# Altium PCB DAC_PCB_Jan311.PcbDoc
Units mil, origin at the board's own origin, x right, y up, seen from the top; angles counter-clockwise.
Board outline 1555 x 2075 mil, 4 copper layers (Top Layer, VDD, GND, Bottom Layer), stack 23.756 mil thick; 30 components, 30 nets, 112 pads, 25 vias.
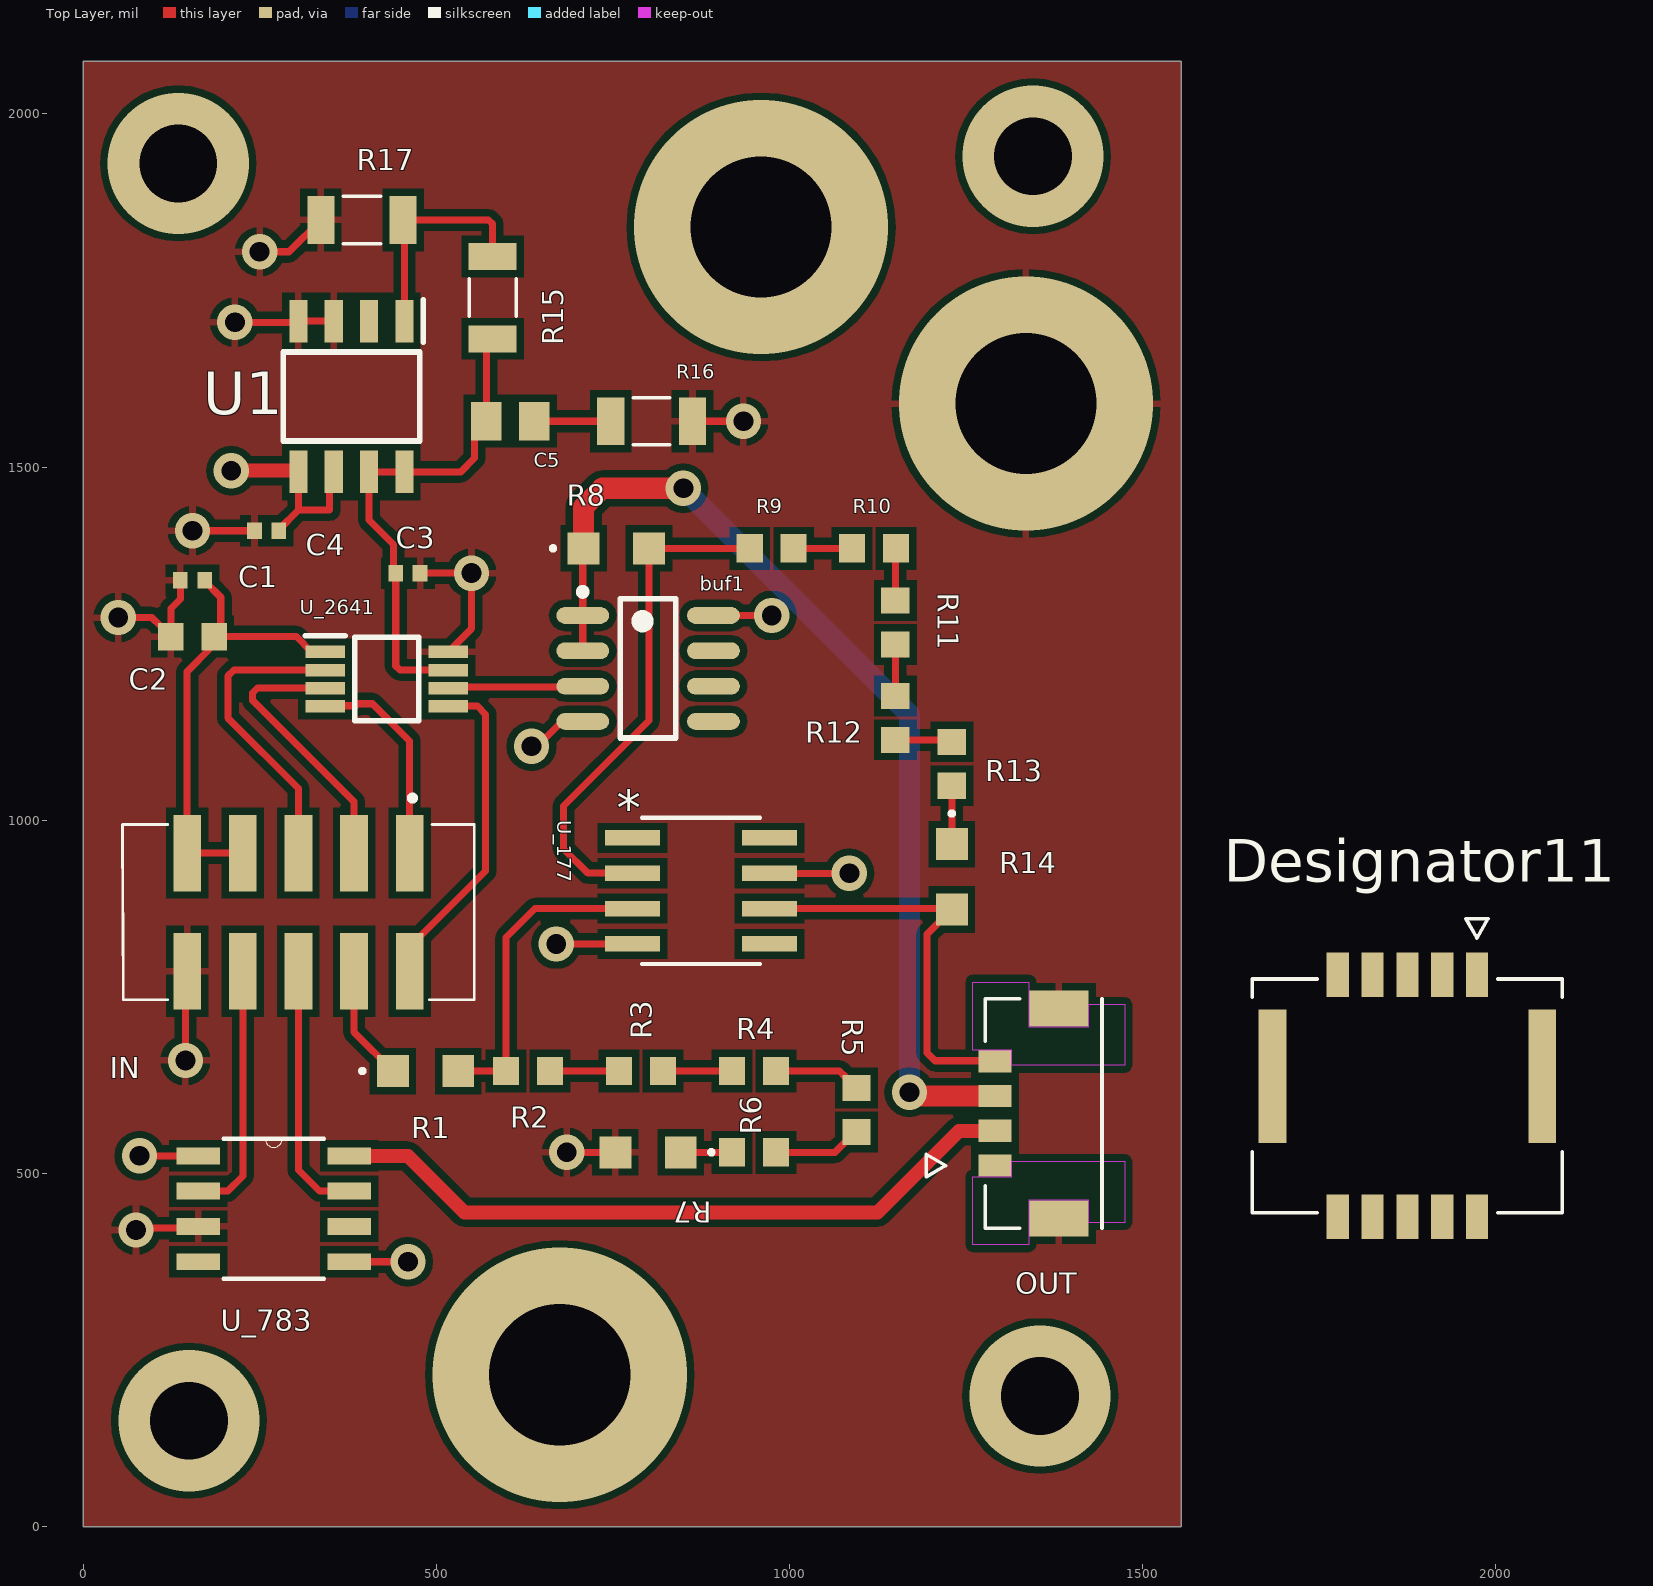
[diagram p0: Top Layer view]
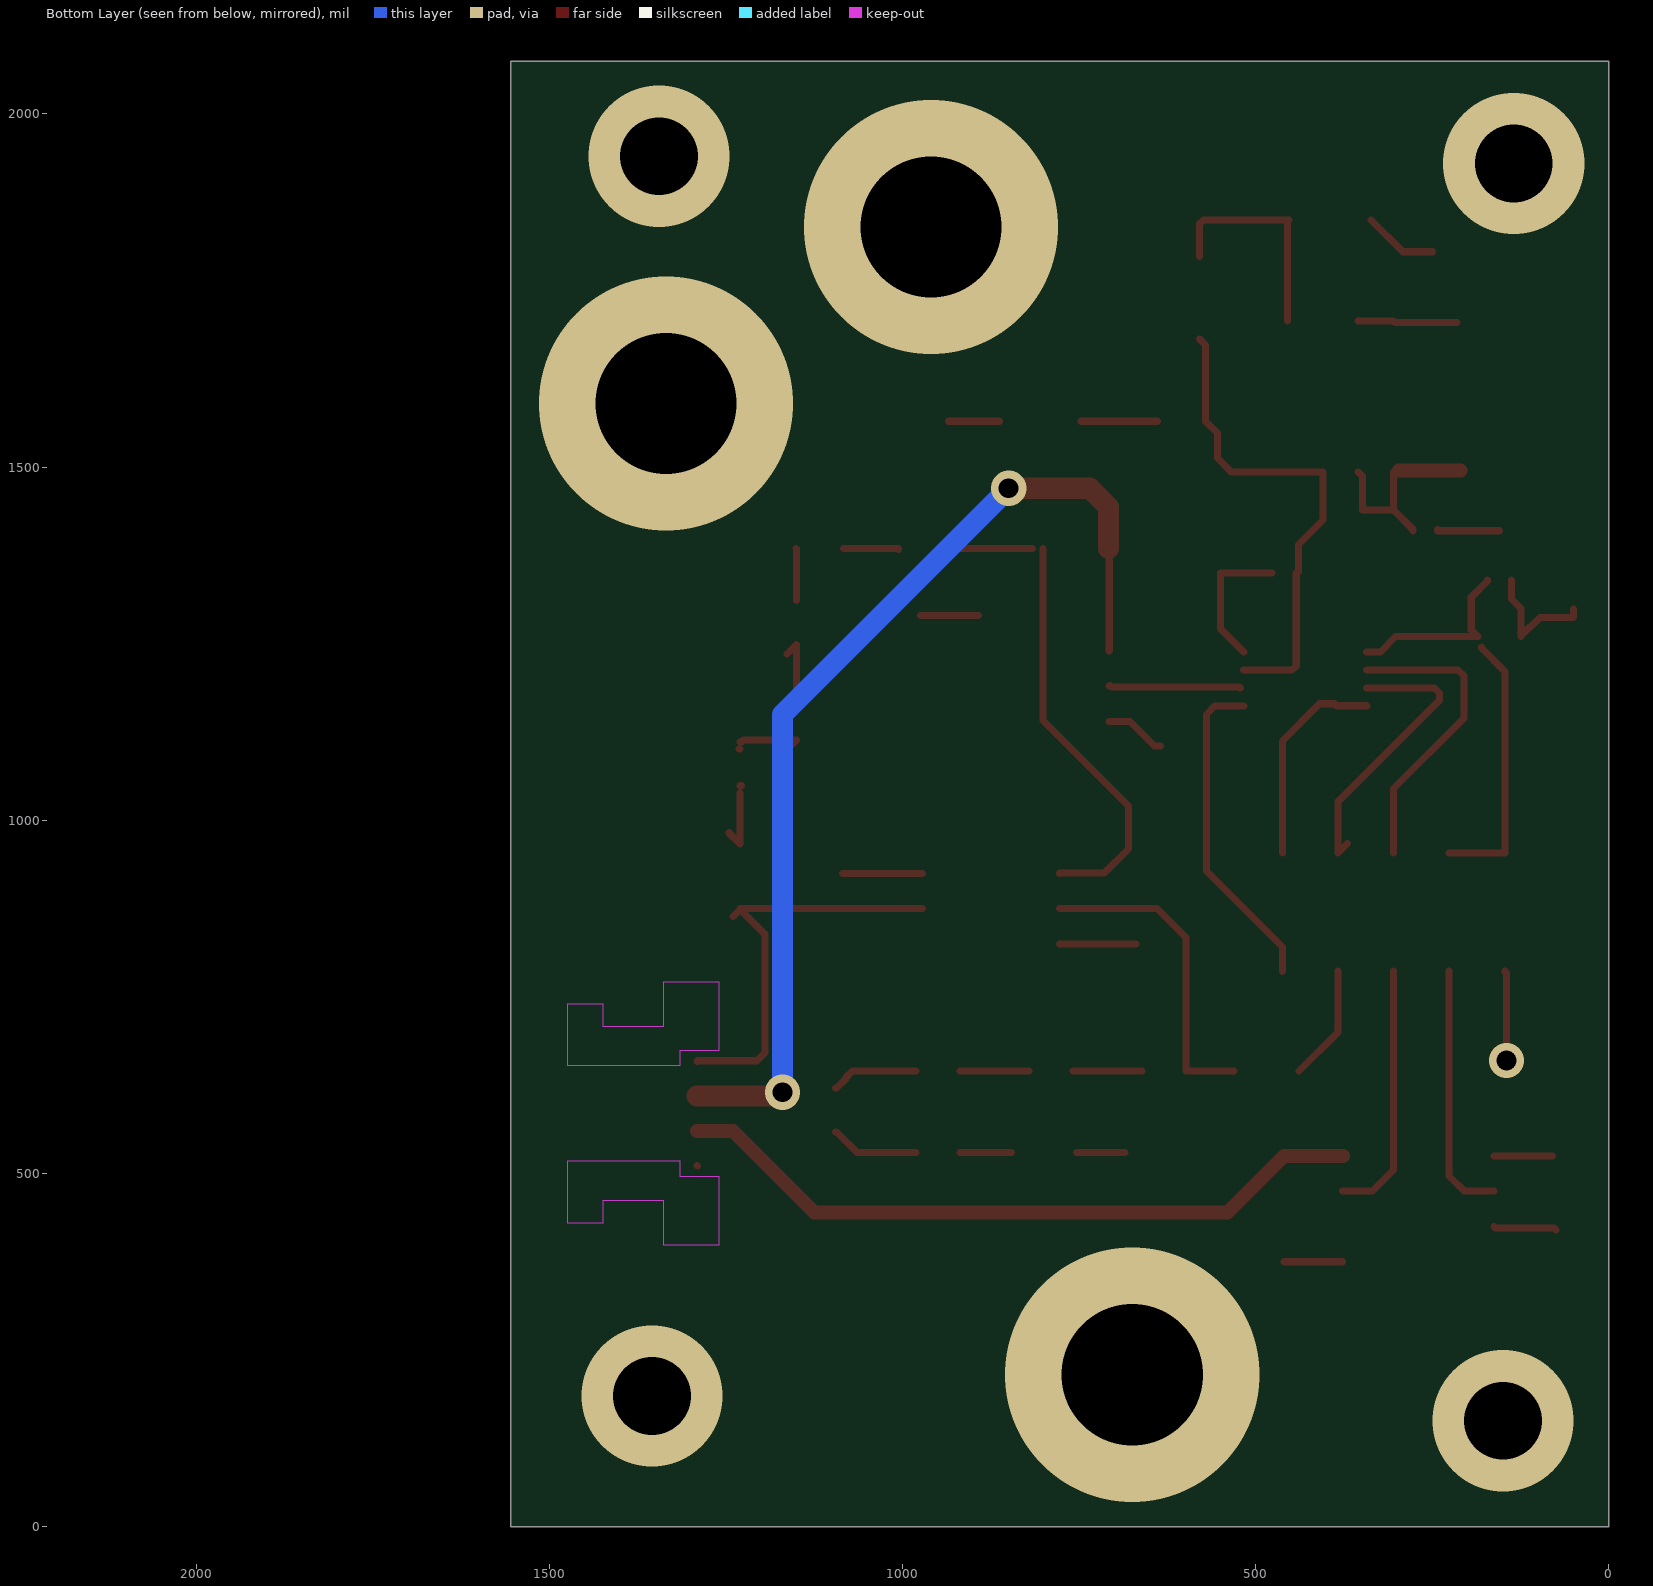
[diagram p1: Bottom Layer view, seen from below]
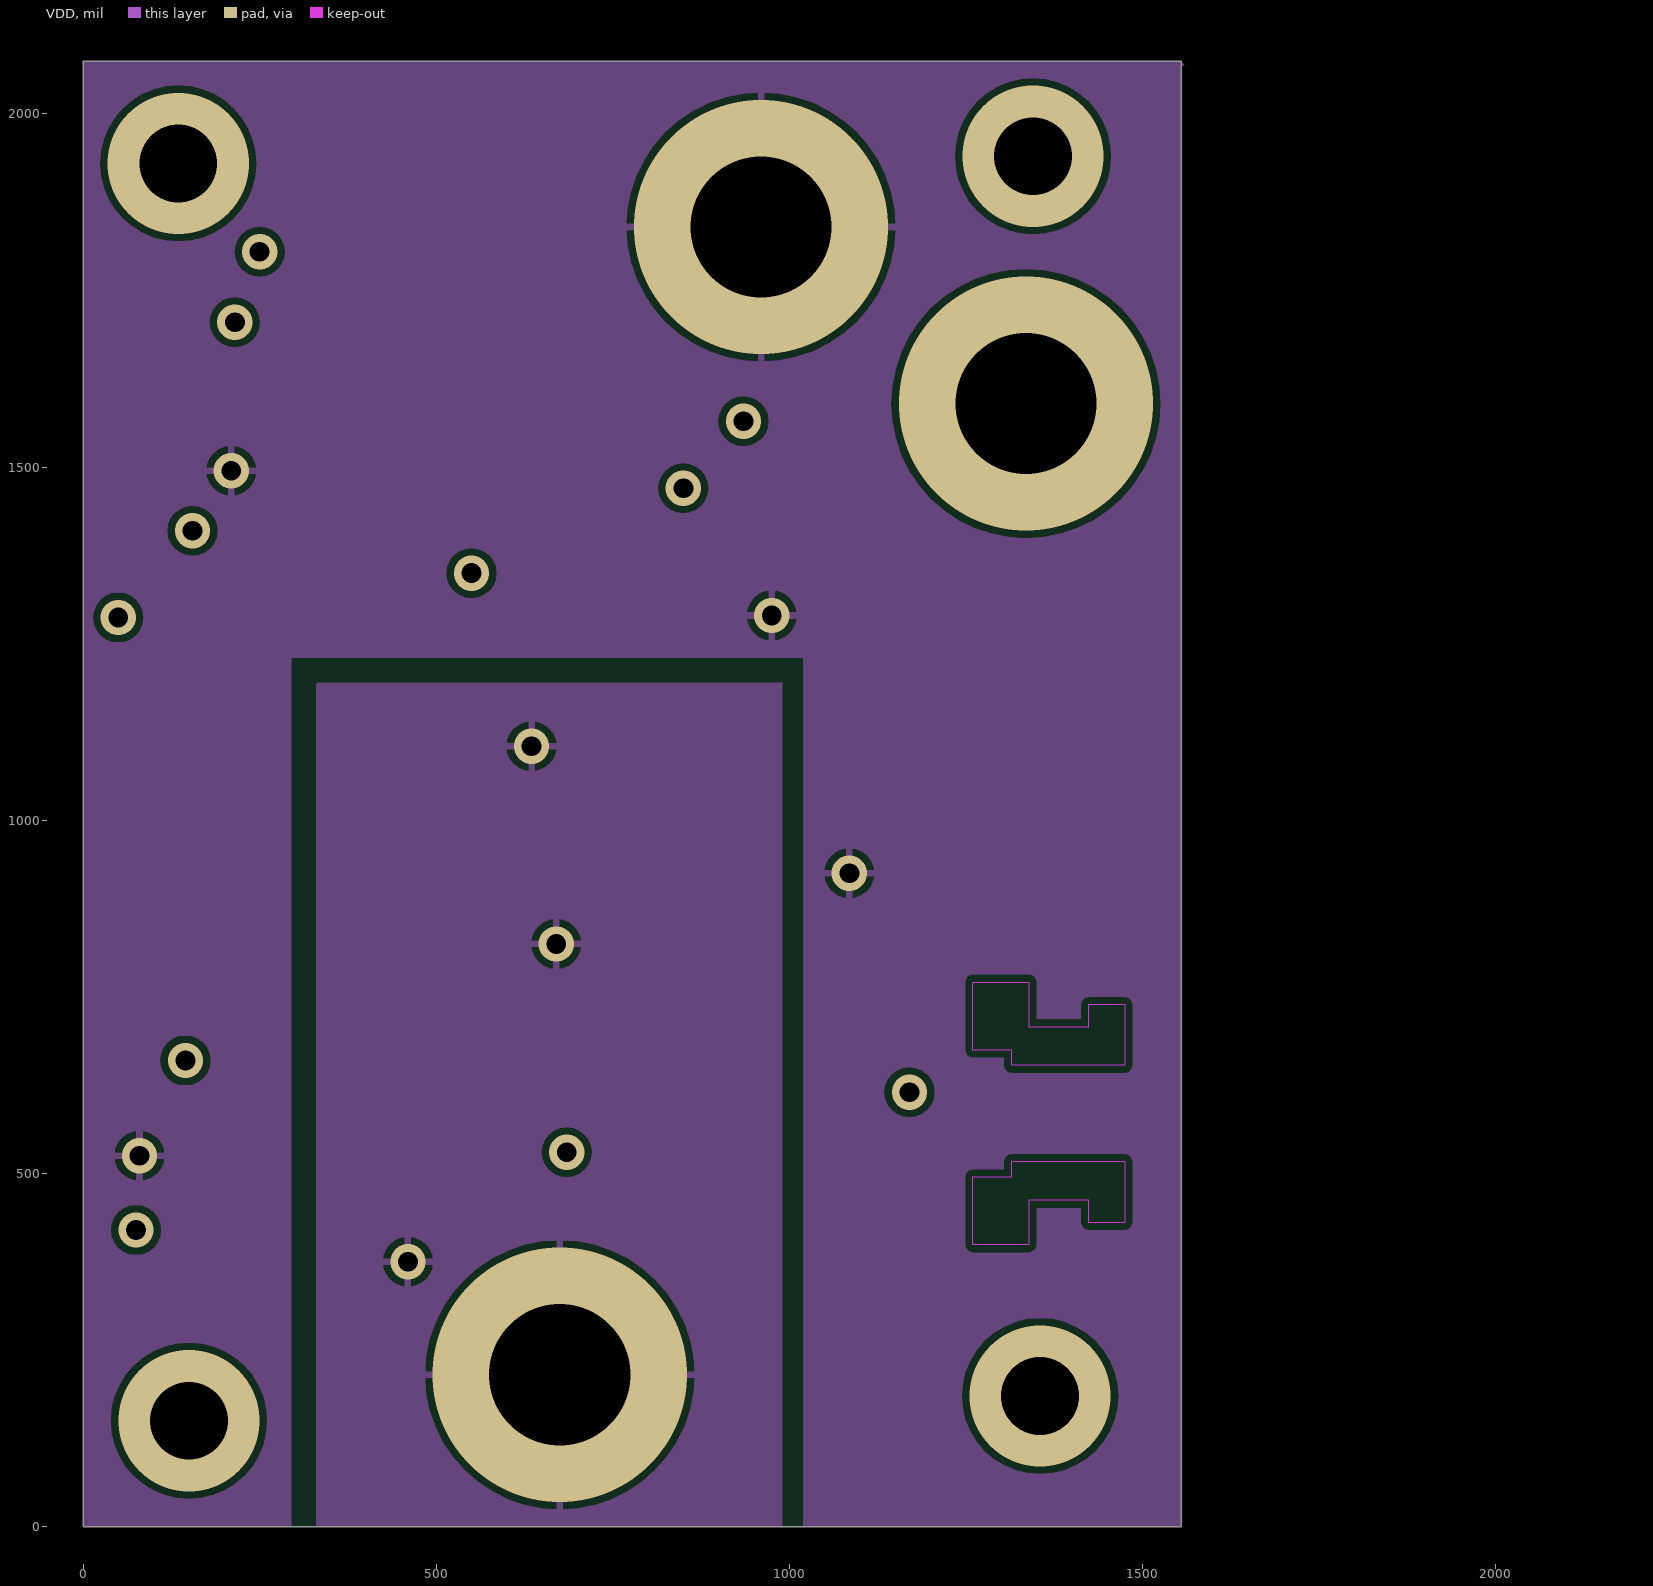
[diagram p2: VDD]
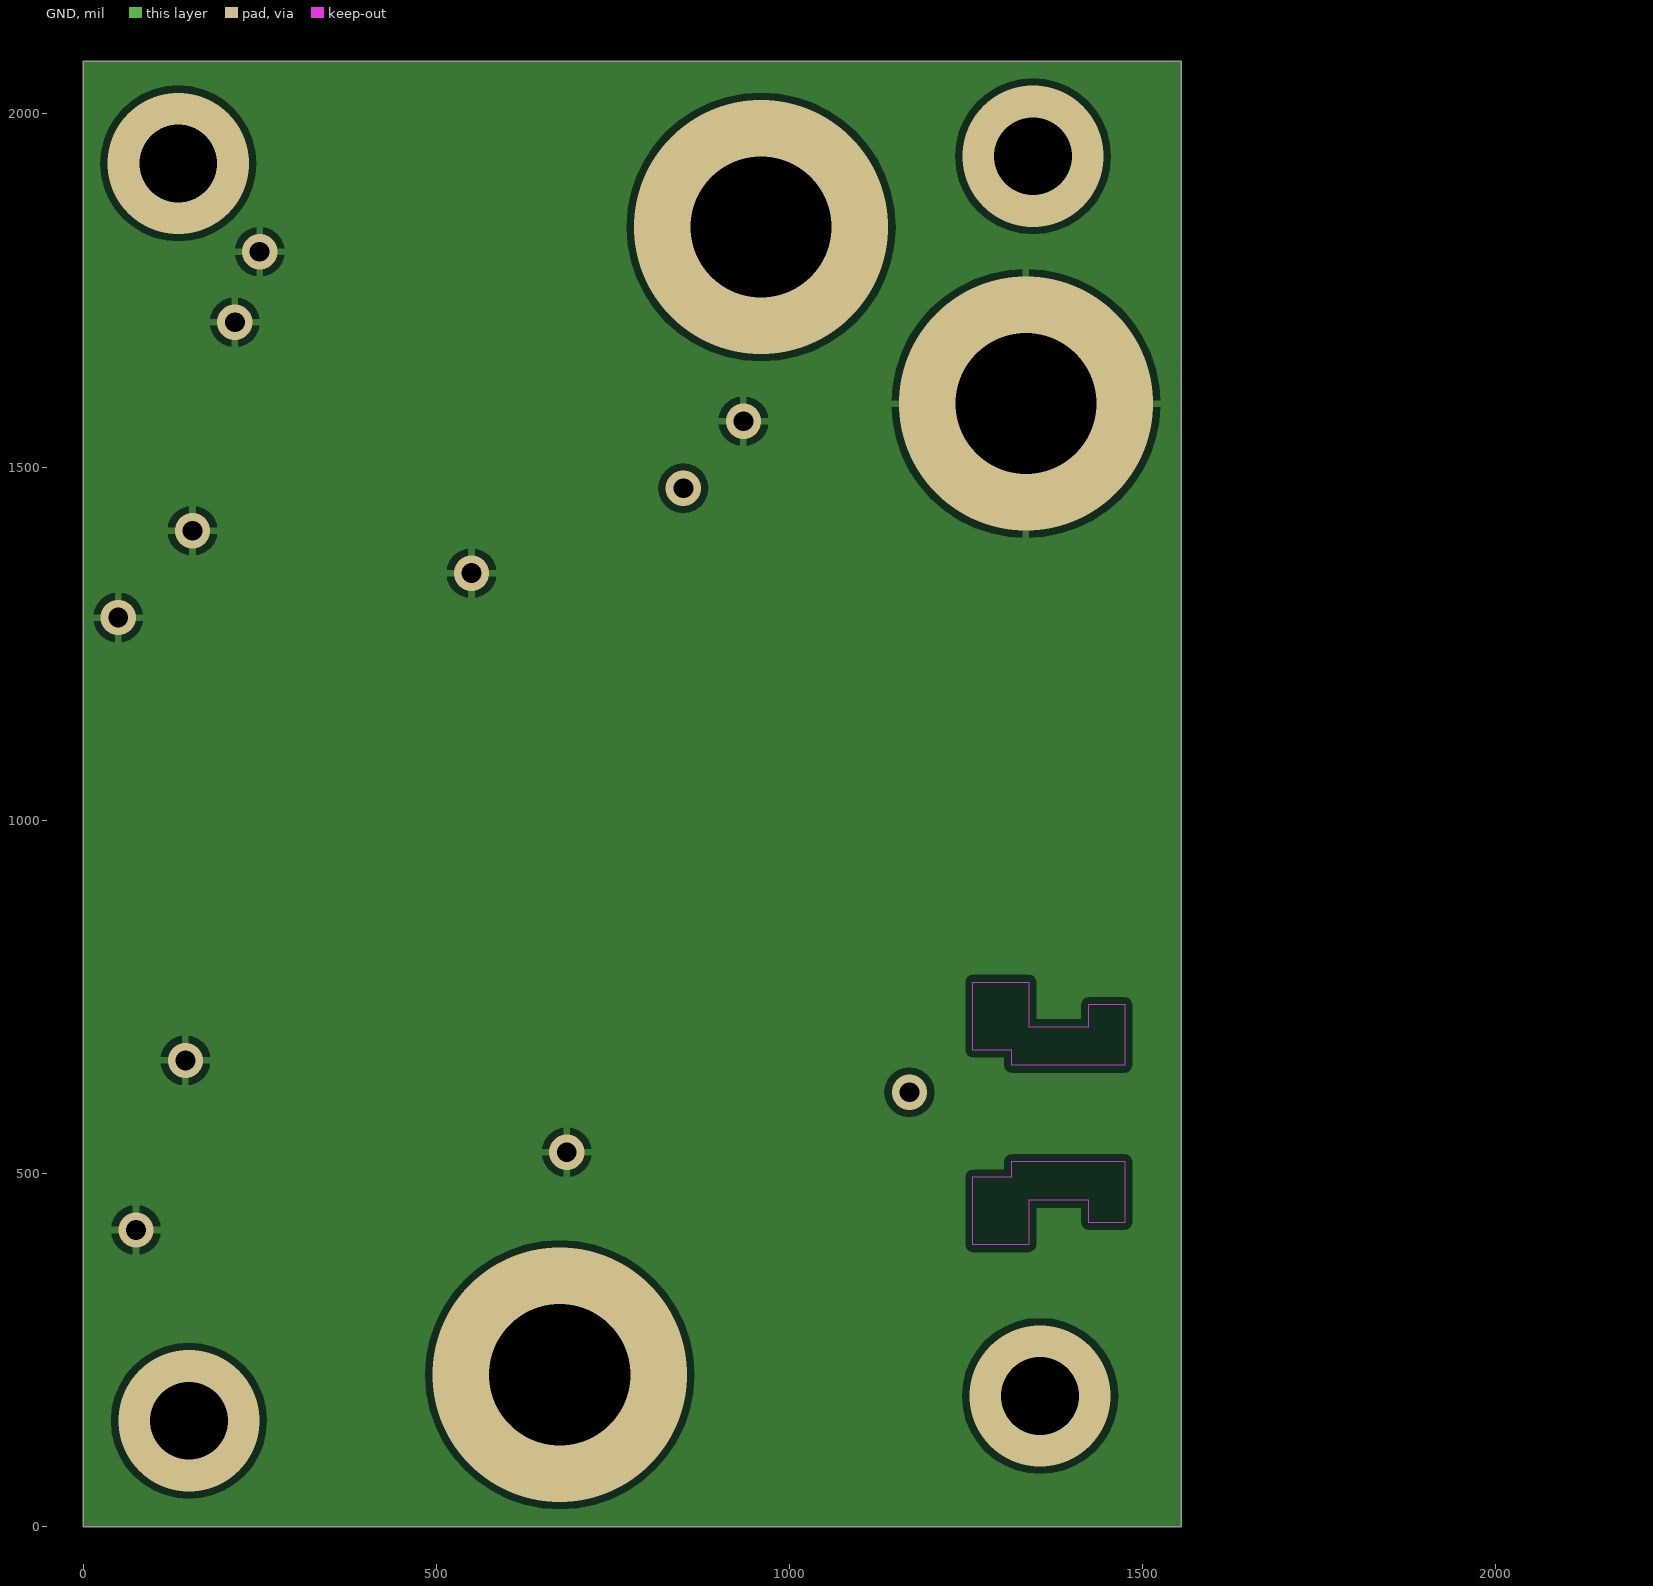
[diagram p3: GND]

## Layer stack, top to bottom
Top Solder: solder mask 0.4, Solder Resist, Dk 3.5
Top Layer: signal copper 1.4
Dielectric 1: prepreg 2.8, PP-006, Dk 4.1
VDD: signal copper 1.378
Dielectric 2: prepreg 12.6, FR-4, Dk 4.8
GND: signal copper 1.378
Dielectric 3: prepreg 2.8, PP-006, Dk 4.1
Bottom Layer: signal copper 1.4
Bottom Solder: solder mask 0.4, Solder Resist, Dk 3.5

## Board outline
0,0 1555,0 1555,2075 0,2075

## Design rules (kind name [scope] priority, off if disabled: settings)
Clearance [All] p1: gap=10 ignorepadtopadclearanceinfootprint=TRUE except(0: Arc-Hole Track-Hole SMDPad-Hole THPad-Hole Via-Hole Fill-Hole Poly-Hole Region-Hole Text-Hole)
PolygonConnect [All] p1: connectstyle=Relief reliefconductorwidth=10 reliefentries=4 polygonreliefangle="90 Angle" airgapwidth=10
RoutingVias [All] p1: holewidth=28 width=50 viastyle="Through Hole" minholewidth=28 minwidth=50 maxholewidth=28 maxwidth=50
SolderMaskExpansion [All] p1: expansion=4 istentingtop=FALSE
Width [All] p1: maxlimit=30 minlimit=10 preferedwidth=10 midlayer1_maxwidth=10 midlayer2_maxwidth=10 minimp=50.000000 maximp=50.000000 favimp=50.000000
30 further rules are at their usual default settings.

## Classes and differential pairs
component class DAC_Connectors: IN OUT
component class DAC&DifferenceAmp: buf1 C1 C2 C3 C4 C5 R1 R2 R3 R4 R5 R6 R7 R8 R9 R10 R11 R12 R13 R14 R15 R16 R17 U1 U_177 U_783 U_2641

## Components (designator, comment, footprint, x,y, rotation, side; value= is the part's Value field where it differs from the comment)
buf1 "LT1678IS8#PBF" LT-S8-8_L 800,1215 r0 top
C1 "C1005X5R1C104K050BA" CAPC1005X55N 155,1340 r180 top
C2 "0603YD105KAT2A" CAPC1608X90N 155,1260 r180 top
C3 "C1005X5R1C104K050BA" CAPC1005X55N 460,1350 r180 top
C4 "C1005X5R1C104K050BA" CAPC1005X55N 260,1410 r180 top
C5 "CL21A475KQFNNNG" CAPC2012X135N 605,1565 r0 top
Designator11 "Comment" MOLEX_2077601081 1875,610 r0 top
IN "151118-1010" 1511181010 305,870 r180 top
OUT "5055670481" MOLEX_5055670481 1360,585 r270 top
R1 "ERA-6ARW102V" ERA6A_(0805) 485,645 r0 top
R2 "RG1608N-513-W-T1" RESC1608X50N 630,645 r0 top
R3 "RG1608N-513-W-T1" RESC1608X50N 790,645 r0 top
R4 "RG1608N-513-W-T1" RESC1608X50N 950,645 r0 top
R5 "RG1608N-513-W-T1" RESC1608X50N 1095,590 r270 top
R6 "RG1608N-513-W-T1" RESC1608X50N 950,530 r180 top
R7 "ERA-6ARW102V" ERA6A_(0805) 800,530 r180 top
R8 "ERA-6ARW102V" ERA6A_(0805) 755,1385 r0 top
R9 "RG1608N-513-W-T1" RESC1608X50N 975,1385 r0 top
R10 "RG1608N-513-W-T1" RESC1608X50N 1120,1385 r0 top
R11 "RG1608N-513-W-T1" RESC1608X50N 1150,1280 r270 top
R12 "RG1608N-513-W-T1" RESC1608X50N 1150,1145 r270 top
R13 "RG1608N-513-W-T1" RESC1608X50N 1230,1080 r270 top
R14 "ERA-6ARW102V" ERA6A_(0805) 1230,920 r270 top
R15 "RQ73C2B174KBTD" RESC3116X75N 580,1740 r90 top
R16 "RNCF1206AKT10R0" RESC3015X65N 805,1565 r0 top
R17 "RQ73C2B169KBTD" RESC3116X75N 395,1850 r180 top
U1 "TPS76601D" SOIC127P600X175-8N 380,1600 r270 top
U_177 "OP177GSZ" R_8_ADI 875,900 r0 top
U_783 "AD783JRZ" SOIC127P600X272-8N 270,450 r0 top
U_2641 "LTC2641CMS8-16#PBF" SOP65P490X110-8N 430,1200 r0 top

## Footprints (in the part's own frame and the unit in brackets; to place one, negate y for a bottom-side part, rotate by r counter-clockwise, add the part's x,y. Pads: shape width x height; smd on the part's side, far side on the other; paste and mask are expansions set on the pad)
1511181010 [mm]
  rect 1x2.75 smd: 1(-4,-2.125) 2(-4,2.125) 3(-2,-2.125) 4(-2,2.125) 5(0,-2.125) 6(0,2.125) 7(2,-2.125) 8(2,2.125) 9(4,-2.125) 10(4,2.125)
  silkscreen extent -6.32,-4.2 6.32,3.15, body extent -6.32,-3.4 6.32,3.4, height 9.35
CAPC1005X55N [mm]
  rect 0.53x0.6 smd: 1(-0.437,0) 2(0.437,0)
CAPC1608X90N [mm]
  rect 0.92x0.98 smd: 1(-0.775,0) 2(0.775,0)
CAPC2012X135N [mm]
  rect 1.1x1.38 smd: 1(-0.863,0) 2(0.863,0)
ERA6A_(0805) [mm]
  rect 1.15x1.15 smd: 1(-1.175,0) 2(1.175,0)
  silkscreen extent -2.32,-0.05 -2.22,0.05, body extent -1,-0.63 1,0.63, height 0.5
LT-S8-8_L [mm] "SOIC, 8-Leads, Body 4.9x3.9mm, Pitch 1.27mm, IPC High Density"
  oval 1.9x0.6 smd: 1(-2.35,1.905) 2(-2.35,0.635) 3(-2.35,-0.635) 4(-2.35,-1.905) 5(2.35,-1.905) 6(2.35,-0.635) 7(2.35,0.635) 8(2.35,1.905)
  silkscreen extent -2.47,-2.5 1,2.88, body extent -2,-2.5 2,2.5, height 1.76
MOLEX_2077601081 [mm]
  rect 0.8x1.6 smd mask+0: 1(2.5,4.35) 2(2.5,-4.35) 3(1.25,4.35) 4(1.25,-4.35) 5(0,4.35) 6(0,-4.35) 7(-1.25,4.35) 8(-1.25,-4.35) 9(-2.5,4.35) 10(-2.5,-4.35)
  rect 1x4.8 smd mask+0: S1(-4.85,0.7) S2(4.85,0.7)
  silkscreen extent -5.58,-4.2 5.58,6.37
MOLEX_5055670481 [mm]
  rect 0.8x1.2 smd mask+0: 1(1.875,-1.75) 2(0.625,-1.75) 3(-0.625,-1.75) 4(-1.875,-1.75)
  rect 1.3x2.15 smd mask+0: S1(-3.775,0.545) S2(3.775,0.545)
  Keep-Out Layer region: 3.925,1.62 3.125,1.62 3.125,-0.53 4.725,-0.53 4.725,-2.55 2.275,-2.55 2.275,-1.15 1.725,-1.15 1.725,2.92 3.925,2.92
  Keep-Out Layer region: -1.725,-1.15 -2.275,-1.15 -2.275,-2.55 -4.725,-2.55 -4.725,-0.53 -3.125,-0.53 -3.125,1.62 -3.925,1.62 -3.925,2.92 -1.725,2.92
  Keep-Out Layer region: 3.925,1.62 3.125,1.62 3.125,-0.53 4.725,-0.53 4.725,-2.55 2.275,-2.55 2.275,-1.15 1.725,-1.15 1.725,2.92 3.925,2.92
  Keep-Out Layer region: -1.725,-1.15 -2.275,-1.15 -2.275,-2.55 -4.725,-2.55 -4.725,-0.53 -3.125,-0.53 -3.125,1.62 -3.925,1.62 -3.925,2.92 -1.725,2.92
  silkscreen extent -4.13,-4.22 4.13,2.1
R_8_ADI [mil]
  rect 78x22 smd paste+0 mask+0: 1(-97,75) 2(-97,25) 3(-97,-25) 4(-97,-75) 5(97,-75) 6(97,-25) 7(97,25) 8(97,75)
  silkscreen extent -84,-104 84,104, body extent -129,-143 129,143, height 71
RESC1608X50N [mm]
  rect 0.94x1.02 smd: 1(-0.79,0) 2(0.79,0)
RESC3015X65N [mm]
  rect 0.98x1.72 smd: 1(-1.47,0) 2(1.47,0)
  silkscreen extent -0.66,-0.85 0.66,0.85
RESC3116X75N [mm]
  rect 0.97x1.73 smd: 1(-1.48,0) 2(1.48,0)
  silkscreen extent -0.67,-0.85 0.67,0.85
SOIC127P600X175-8N [mm]
  rect 1.525x0.65 smd: 1(-2.712,1.905) 2(-2.712,0.635) 3(-2.712,-0.635) 4(-2.712,-1.905) 5(2.712,-1.905) 6(2.712,-0.635) 7(2.712,0.635) 8(2.712,1.905)
  silkscreen extent -3.47,-2.45 1.6,2.58, body extent -3,-2.45 3,2.45, height 1.75
SOIC127P600X272-8N [mil]
  rect 62x24 smd: 1(-107,75) 2(-107,25) 3(-107,-25) 4(-107,-75) 5(107,-75) 6(107,-25) 7(107,25) 8(107,75)
  silkscreen extent -71,-99 71,99, body extent -96,-118 96,118, height 30
SOP65P490X110-8N [mm]
  rect 1.425x0.45 smd: 1(-2.212,0.975) 2(-2.212,0.325) 3(-2.212,-0.325) 4(-2.212,-0.975) 5(2.212,-0.975) 6(2.212,-0.325) 7(2.212,0.325) 8(2.212,0.975)
  silkscreen extent -2.93,-1.5 1.15,1.55, body extent -2.45,-1.5 2.45,1.5, height 1.1

## Part data
buf1: library part CMP-0359-03474-2, "Dual Channel, Very Low 1/f Corner Frequency Precision Operational Amplifier, 20 MHz Typical GBW, 6 V/us Typical SR, 3 to 36 V, 8-Pin SOIC (S8-8), Industrial, Pb-Free", Linear Technology Part Number=LT1678, Manufacturer="Linear Technology", Channels (#)=2, ComponentLink1Description="Manufacturer URL", ComponentLink1URL=http://www.linear.com/, ComponentLink2Description=Datasheet, ComponentLink2URL=http://cds.linear.com/docs/en/datasheet/16789fs.pdf, ComponentLink3Description="Package Specification", ComponentLink3URL=http://cds.linear.com/docs/en/packaging/05081610_G_SO8.pdf, GBW (MHz) Typical=20, Is (mA) Typical=2, Mounting Technology="Surface Mount", PackageDescription="8-Pin Plastic Small Outline, Body 4.9 x 3.9 mm, Pitch 1.27 mm", PackageReference=LT-S8-8, PackageVersion="Rev G", PartNumber=LT1678IS8#PBF, RevisionNote="URLs updated", RoHS=Pb-Free, SR (V/us) Typical=6, Type=VFB, Vos (mV) Guaranteed=0.1, Vos (mV) Typical=0.035, Vs Max (V)=36, Vs Min (V)=3
C1 C3 C4: "CERAMIC CAPACITOR, 0.1UF, 16V, X5R, 10%, 0402", Package=None, Availability=Unavailable, MP=C1005X5R1C104K050BA, Price=None
C2: "1ÂµF Â±10% 16V Ceramic Capacitor X5R 0603 (1608 Metric)", Package="1608 AVX", Availability=Unavailable, DigiKey-Purchase-URL=https://snapeda.com/shop?store=DigiKey&id=270397, MF=AVX, MP=0603YD105KAT2A, Price=None, SnapEDA_Link=https://www.snapeda.com/parts/0603YD105KAT2A/AVX%20/%20Kyocera/view-part/270397/?ref=snap
C5: "4.7U 6.3V K0805 X5R", Package=None, Availability=Unavailable, MP=CL21A475KQFNNNG, Price=None
IN: "Connector", Manufacturer_Name=Molex, Datasheet Link=https://www.molex.com/pdm_docs/sd/1511181010_sd.pdf, Height=9.25mm, Manufacturer_Part_Number=151118-1010
OUT: "1.25mm Pitch, Micro-Lock Plus PCB Header, Right-Angle, Surface Mount, 0.10Âµm Gold Plating, Positive Lock, 4 Circuits, Black", Package=None, Availability="In Stock", Check_prices=https://www.snapeda.com/parts/5055670481/Molex/view-part/5660370/?ref=eda, MF=Molex, MP=5055670481, Price=None, SnapEDA_Link=https://www.snapeda.com/parts/5055670481/Molex/view-part/5660370/?ref=snap
R1 R7 R8 R14: "Resistor", Manufacturer_Name=Panasonic, Datasheet Link=http://industrial.panasonic.com/cdbs/www-data/pdf/RDM0000/AOA0000C307.pdf, Height=0.6mm, Manufacturer_Part_Number=ERA-6ARW102V
R2 R3 R4 R5 R6 R9 R10 R11 R12 R13 R15 R16 R17: Package=None, Availability=Unavailable, Price=None
  R2 R3 R4 R5 R6 R9 R10 R11 R12 R13: MP=RG1608N-513-W-T1
  R15: MP=RQ73C2B174KBTD
  R16: MP=RNCF1206AKT10R0
  R17: MP=RQ73C2B169KBTD
U1: "Integrated Circuit", Manufacturer_Name="Texas Instruments", Mouser Part Number=595-TPS76601D, Datasheet Link=https://www.ti.com/lit/ds/symlink/tps766.pdf?ts=1633601131788&ref_url=https%253A%252F%252Fwww.ti.com%252Fstore%252Fti%252Fen%252Fp%252Fproduct%252F%253Fp%253DTPS76601D%2526keyMatch%253DTPS76601D%2526tisearch%253Dsearch-everything%2526usecase%253DOPN, Height=1.75mm, Manufacturer_Part_Number=TPS76601D, Mouser Price/Stock=https://www.mouser.co.uk/ProductDetail/Texas-Instruments/TPS76601D?qs=6zVL%252ByCp0mox2N1yVKwG6w%3D%3D
U_177: "No Description Available", Built_By=EMA_UL_Team, Copyright="Copyright (C) 2021 Accelerated Designs. All rights reserved", Manufacturer_Part_Number=OP177GSZ, RefDes=RefDes, SourceLibrary=Analog_2012-01-01_9, Type=DEV, Vendor="Analog Devices Inc"
U_783: "Sample and Hold Amplifier 1 Circuit 8-SOIC", Package="SOIC-8 Analog Devices", Availability=Bad, Check_prices=https://www.snapeda.com/parts/AD783JRZ/Analog%20Devices%20Inc./view-part/353069/?ref=eda, MF="Analog Devices", MP=AD783JRZ, Price=None, Purchase-URL=https://pricing.snapeda.com/search/part/AD783JRZ/?ref=eda, SnapEDA_Link=https://www.snapeda.com/parts/AD783JRZ/Analog%20Devices%20Inc./view-part/353069/?ref=snap
U_2641: "Integrated Circuit", Manufacturer_Name="Analog Devices", Mouser Part Number=584-C2641CMS8-16PBF, Arrow Part Number=LTC2641CMS8-16#PBF, Arrow Price/Stock=https://www.arrow.com/en/products/ltc2641cms8-16pbf/analog-devices, Datasheet Link=https://www.analog.com/media/en/technical-documentation/data-sheets/26412fd.pdf, Height=1.1mm, Manufacturer_Part_Number=LTC2641CMS8-16#PBF, Mouser Price/Stock=https://www.mouser.com/Search/Refine.aspx?Keyword=584-C2641CMS8-16PBF

## Via types
v1: diameter 50, hole 28, Top Layer to GND, 8 vias
v2: diameter 50, hole 28, Top Layer to VDD, 7 vias
v3: diameter 200, hole 110, Top Layer to Bottom Layer, 4 vias
v4: diameter 50, hole 28, Top Layer to Bottom Layer, 3 vias
v5: diameter 360, hole 200, Top Layer to Bottom Layer, 3 vias

## Nets (pads, with @x,y where several pads share a name; then routed paths per layer and width w, separated by ;. In a path a pad name is that pad's centre, name@x,y a point inside that pad or via, vN(x,y) a via of type N, cw(c..) or ccw(c..) an arc to the next point about the centre after c; other vN are vias at no path point)
+VDD: buf1.8 C4.1 U1.5 U1.6 U_177.7 U_783.1 | length 572.5
  Top Layer w10: v2(80,525) U_783.1 ; C4.1 277.2,1411.38 305,1439.17 ; U1.5@297.2,1495 301.77,1490.43 301.77,1490 U1.5 305,1439.17 ; U1.6 349.14,1487.37 349.14,1439.17 305,1439.17 ; buf1.8 v2(975,1290) ; U_177.7 v2(1085,925)
  Top Layer w20: v2(210,1495) U1.5@297.2,1495
  other v5: 960,1840
-VDD: buf1.4 U_177.4 U_783.5 | length 278
  Top Layer w10: U_783.5 v2(460,375) ; v2(635,1105) 643.2,1105 678.2,1140 buf1.4 ; v2(670,825) U_177.4
  other v5: 675,215
AGND: C1.2 C2.2 C3.1 C4.2 IN.10 OUT.S1 OUT.S2 R7.2 R16.2 R17.2 U1.3 U1.4 U_783.3 U_2641.8 | length 1074.5
  Top Layer w10: v1@50,1299.18 v1(50,1287.09) 97.4,1287.09 110.2,1274.29 111.38,1274.29 C2.2@124.49,1261.18 ; v1(75,420) 77.5,422.5 160.5,422.5 U_783.3 ; C2.2 C2.2@124.49,1261.18 ; C1.2 137.8,1313.11 124.49,1299.8 C2.2@124.49,1261.18 ; v4(145,660) 145,783.82 IN.10 ; v1(155,1410) C4.2 C4.2@242.8,1411.38 ; v1(215,1705) 303.23,1705 U1.4 U1.3 ; v1(250,1805) 291.73,1805 R17.2 ; C3.1 v1(550,1350) 550,1271.3 U_2641.8 ; v1(685,530) R7.2 ; R16.2 v1(935,1565)
  other v5: 1335,1590
DAC_CLR: IN.2 U_2641.5 | length 465.9
  Top Layer w10: IN.2 462.48,820.79 570,928.31 570,1150 558.39,1161.61 U_2641.5
DACCS: IN.5 U_2641.2 | length 433.4
  Top Layer w10: IN.5 305,1045 205,1145 205,1204.14 213.65,1212.8 U_2641.2
DACSCLK: IN.3 U_2641.3 | length 411.2
  Top Layer w10: U_2641.3 247.2,1187.2 240,1180 240,1170 383.74,1026.26 IN.3 IN.3@370,967.4
DACVDD: C3.2 C5.1 R15.1 U1.7 U1.8 U_2641.7 | length 705.3
  Top Layer w10: C3.2@442.8,1348.62 439.67,1351.75 439.67,1390.33 405,1425 U1.7 U1.8 534.76,1493.23 554.37,1512.83 554.37,1548.35 C5.1 571.02,1672.76 R15.1 ; C3.2 442.8,1218.65 448.65,1212.8 U_2641.7
daout: buf1.3 U_2641.6 | length 187.5
  Top Layer w10: U_2641.6@522.09,1187.2 523.48,1188.6 703.88,1188.6 706.38,1191.1 buf1.3
diffin: buf1.1 buf1.2 OUT.3 R8.1 | length 1450.5
  Top Layer w10: buf1.2 buf1.1 R8.1@707.48,1368.74
  Top Layer w30: R8.1 708.74,1443.74 735,1470 v4(850,1470) ; v4(1170,615) 1175.41,615 1180.81,609.61 OUT.3
  Bottom Layer w30: v4(850,1470) 1170,1150 v4(1170,615)
NetC1_1: C1.1 C2.1 IN.7 IN.9 U_2641.1 | length 643.5
  Top Layer w10: C1.1 172.2,1338.62 195,1315.83 195,1269.49 C2.1 302.11,1260 323.72,1238.39 U_2641.1 ; C2.1@180.51,1245 180.51,1243.82 147.52,1210.83 IN.9 IN.7
NetC5_2: C5.2 R16.1 | length 108.1
  Top Layer w10: C5.2 R16.1
NetIN_1: IN.1 U_2641.4 | length 301.6
  Top Layer w10: U_2641.4 343.45,1162.16 385.96,1162.16 388.81,1165 410,1165 462.48,1112.52 IN.1
NetIN_4: IN.4 R1.1 | length 164.1
  Top Layer w10: IN.4 383.74,700 R1.1
NetIN_8: IN.8 U_783.2 | length 362.1
  Top Layer w10: U_783.2 205,475 226.26,496.26 IN.8
NetOUT_2: OUT.2 U_783.8 | length 995
  Top Layer w20: U_783.8 460,525 540,445 1125,445 1240.39,560.39 OUT.2
NetOUT_4: OUT.4 R14.2 U_177.6 | length 590.5
  Top Layer w10: U_177.6 R14.2@1230,875 ; R14.2@1239.92,863.82 R14.2 1195,838.74 1195,670.86 1206.29,659.57 1290.35,659.57 OUT.4
NetR1_2: R1.2 R2.1 U_177.3 | length 452.7
  Top Layer w10: R1.2 R2.1 598.9,833.9 640,875 U_177.3
NetR2_2: R2.2 R3.1 | length 97.8
  Top Layer w10: R2.2 R3.1
NetR3_2: R3.2 R4.1 | length 97.8
  Top Layer w10: R3.2 R4.1
NetR4_2: R4.2 R5.1 | length 124.7
  Top Layer w10: R4.2 1071.1,645 1079.92,636.18 1079.92,634.61 1093.43,621.1 R5.1
NetR5_2: R5.2 R6.1 | length 125.9
  Top Layer w10: R6.1 1064.53,530 1093.43,558.9 R5.2
NetR6_2: R6.2 R7.1 | length 72.6
  Top Layer w10: R7.1 R6.2
NetR8_2: R8.2 R9.1 U_177.2 | length 717.2
  Top Layer w10: U_177.2 777.86,925.14 714.86,925.14 680.43,959.57 680.43,1020.43 801.26,1141.26 R8.2 ; R8.2@816.26,1385 942.32,1385 943.9,1383.43 R9.1
NetR9_2: R9.2 R10.1 | length 80
  Top Layer w10: R9.2 1006.1,1383.43 1007.68,1385 R10.1@1083.9,1385
NetR10_2: R10.2 R11.1 | length 74.4
  Top Layer w10: R11.1 1150,1383.9 R10.2
NetR11_2: R11.2 R12.1 | length 93.5
  Top Layer w10: R12.1@1148.43,1176.1 R12.1 R11.2 R11.2@1163.5,1235.39
NetR12_2: R12.2 R13.1 | length 101.8
  Top Layer w10: R12.2@1163.5,1100.39 R12.2 1225.63,1113.9 1228.43,1111.1 R13.1 ; R13.1@1230,1101.1 R13.1@1231.57,1101.1
NetR13_2: R13.2 R14.1 | length 97
  Top Layer w10: R13.2@1228.43,1048.9 R13.2 ; R13.2@1230,1038.9 R14.1 R14.1@1246.14,982.4
NetR15_2: R15.2 R17.1 U1.1 | length 319
  Top Layer w10: U1.1 455,1848.27 R17.1 574.14,1850 580,1844.14 R15.2
"S&H Control": IN.6 U_783.7 | length 365.8
  Top Layer w10: IN.6 305,505 335,475 U_783.7
pads on no net: buf1.5 buf1.6 buf1.7 Designator11.1 Designator11.2 Designator11.3 Designator11.4 Designator11.5 Designator11.6 Designator11.7 Designator11.8 Designator11.9 Designator11.10 Designator11.S1 Designator11.S2 OUT.1 U1.2 U_177.1 U_177.5 U_177.8 U_783.4 U_783.6
copper on no net: | length 1.1
  Top Layer w10: 1290.35,510.43 1291.1,511.18
  other v3: 150,150 1355,185 135,1930 1345,1940

## Polygon pours and split planes (outlines as drawn)
+VDD on VDD "+VDD_L02_P009" (solid, pour order 9): 0,0 295,0 295,1230 1020,1230 1020,0 1555,0 1555,2065.89 1559.17,2070.06 1554.23,2075 0,2075
-VDD on VDD "-VDD_L02_P007" (solid, pour order 7): 330,0 330,1200 335,1195 990,1195 990,0
AGND on GND "AGND_L03_P004" (solid, pour order 4): 0,2075 1555,2075 1555,0 0,0
AGND on Top Layer "AGND_L01_P006" (solid, pour order 6): 0,2075 1555,2075 1555,0 0,0

## Text inside footprints (layer, text, board x,y; h text height)
U_177: Top Overlay "*" at 755.5,992 h50; Mechanical 7 "Default Padstyle: RX78Y22D0T" at 525,601.5 h50; Mechanical 7 "Pin One Padstyle: RX78Y22D0T" at 525,541.5 h50; Mechanical 7 "Alt 1 Padstyle: OX60Y90D30P" at 537.5,361.5 h50; Mechanical 7 "Alt 2 Padstyle: OX90Y60D30P" at 537.5,301.5 h50; Mechanical 7 "0.157in/3.988mm" at 781.25,1093.5 h25; Mechanical 7 "0.244in/6.198mm" at 781.25,1168.5 h25; Mechanical 7 "0.197in/5.004mm" at 1073.5,887.5 h25; Mechanical 7 "0.05in/1.27mm" at 495.5,937.5 h25; Mechanical 7 "0.05in/1.27mm" at 696.75,681.5 h25; Mechanical 13 "*" at 799,945.5 h50